# Altium PCB H-Bridge-Driver_V1.0.PcbDoc
Units mil, origin at the board's own origin, x right, y up, seen from the top; angles counter-clockwise.
Board outline 1050 x 1150 mil, 2 copper layers (Top Layer, Bottom Layer), stack 60.932 mil thick; 24 components, 19 nets, 76 pads, 10 vias.
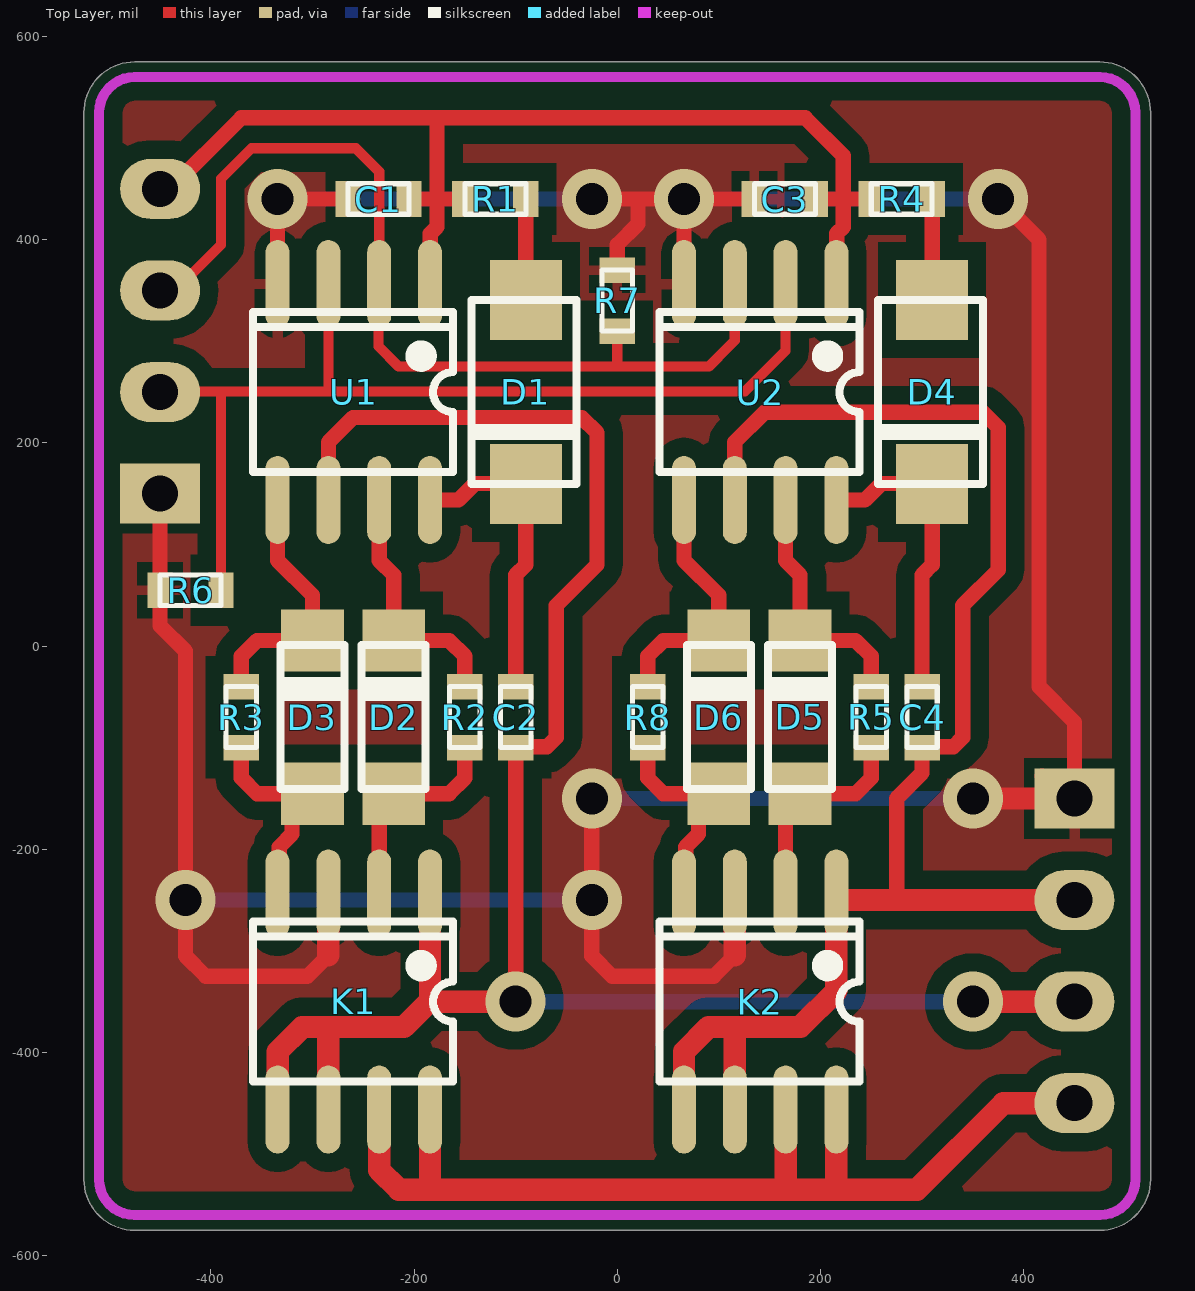
[diagram p0: Top Layer view]
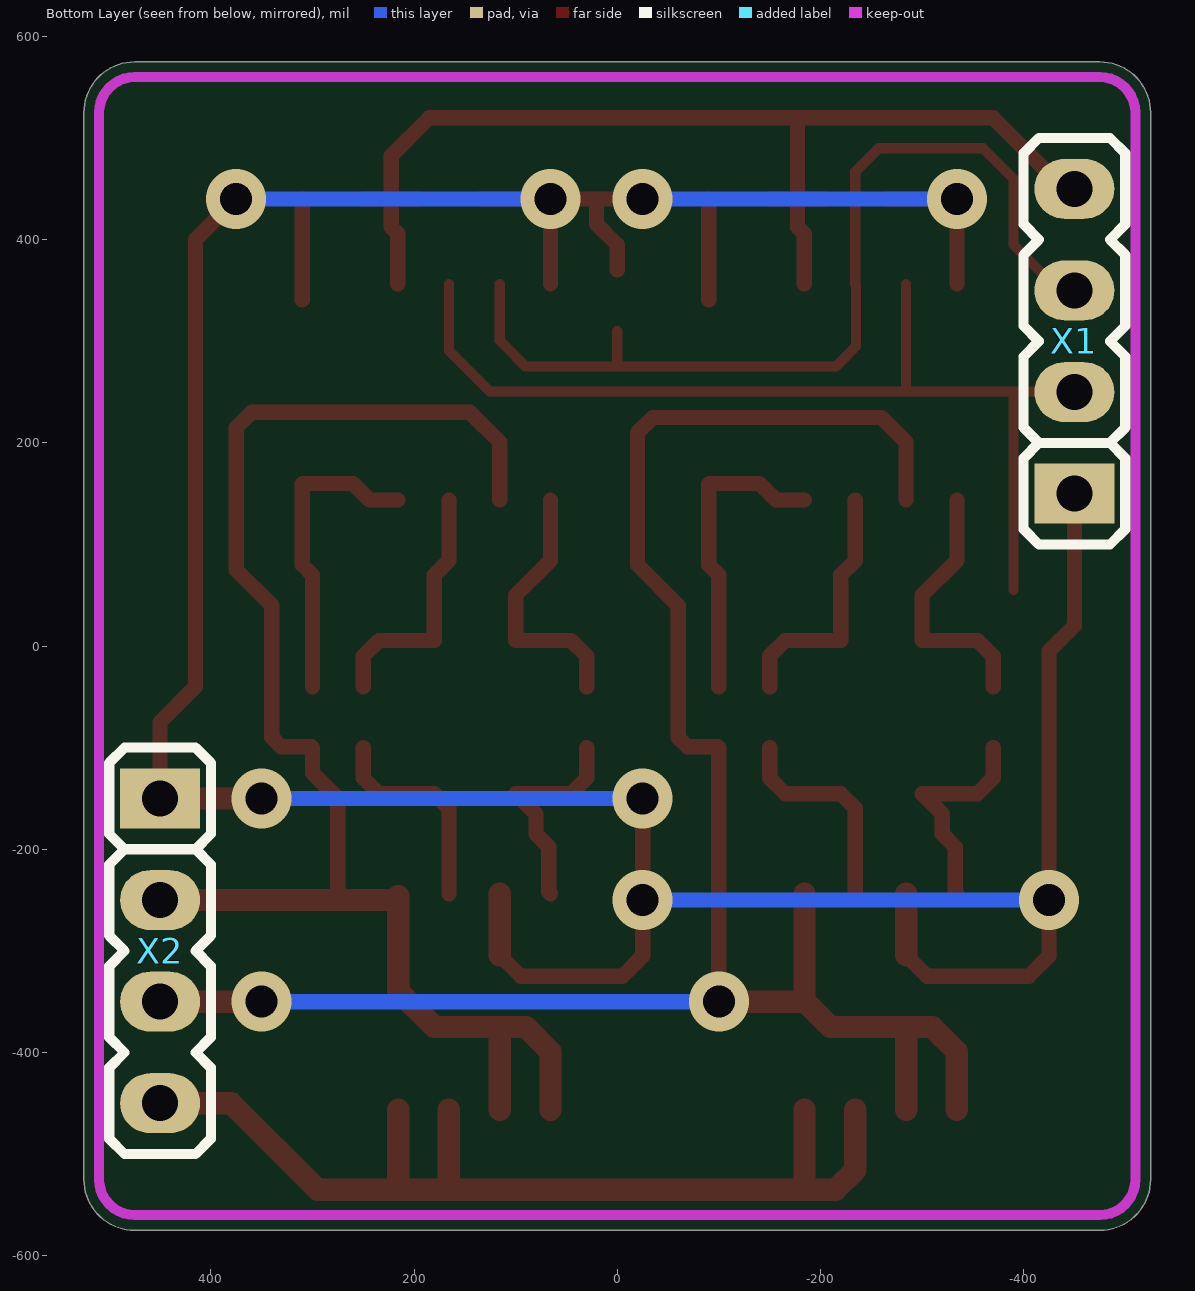
[diagram p1: Bottom Layer view, seen from below]

## Layer stack, top to bottom
Top Solder: solder mask 0.4, Solder Resist, Dk 3.5
Top Layer: signal copper 1.4
Dielectric1: dielectric 58.1323, FR-4, Dk 4.8
Bottom Layer: signal copper 1.4
Bottom Solder: solder mask 0.4, Solder Resist, Dk 3.5

## Board outline
-525,-525 -525,525 cw(c-475,525) -475,575 475,575 cw(c475,525) 525,525 525,-525 cw(c475,-525) 475,-575 -475,-575 cw(c-475,-525)

## Design rules (kind name [scope] priority, off if disabled: settings)
Clearance Ploygon [InPoly] p1: gap=18 ignorepadtopadclearanceinfootprint=FALSE
Clearance [All] p2: gap=6 ignorepadtopadclearanceinfootprint=FALSE
ComponentClearance ComponentClearance_Connectors [HasFootprint('THT PMOD-Connector')] p1: gap=0 collisioncheckmode=3 verticalgap=0 showdistances=FALSE
ComponentClearance ComponentClearance_Mechanical [(Identifier = 'M3 x 0.5mm Thread 6mm LONG SOCKET HEAD CAP SCREW') OR (Identifier = 'Hex Spacer FF M3 L10mm')] p2: gap=0 collisioncheckmode=3 verticalgap=0 showdistances=FALSE
ComponentClearance [All] p3: gap=7.87 collisioncheckmode=3 verticalgap=7.87 showdistances=TRUE
DiffPairsRouting [All] p1: maxlimit=10 minlimit=6 mostfreqgap=6 toplayer_minwidth=6 toplayer_maxwidth=15 toplayer_prefwidth=6 bottomlayer_minwidth=6 bottomlayer_maxwidth=15 bottomlayer_prefwidth=6 maxuncoupledlength=500
FabricationTestPointUsage TestPointUsage [All] p1: valid=0 allowmultiple=FALSE
FabricationTestpoint Testpoint [All] p1: side=3 testpointundercomponent=TRUE minsize=40 maxsize=100 preferedsize=60 minholesize=0 maxholesize=40 preferedholesize=32 testpointgrid=1 allowsidetop=TRUE allowsidebottom=TRUE usegrid=TRUE gridtolerance=0.01
HoleSize [All] p1: absolutevalues=TRUE maxlimit=1000 minlimit=1 maxpercent=80.000 minpercent=20.000
PolygonConnect [All] p1: thpad.connectstyle=Relief thpad.reliefconductorwidth=10 thpad.reliefentries=4 thpad.polygonreliefangle="90 Angle" thpad.airgapwidth=10 smdpad.connectstyle=Relief smdpad.reliefconductorwidth=10 smdpad.reliefentries=4 smdpad.polygonreliefangle="90 Angle" smdpad.airgapwidth=10 via.connectstyle=Direct via.reliefconductorwidth=10 via.reliefentries=4 via.polygonreliefangle="90 Angle" via.airgapwidth=10
RoutingVias [All] p1: holewidth=28 width=50 viastyle="Through Hole" minholewidth=28 minwidth=50 maxholewidth=28 maxwidth=50
SolderMaskExpansion [All] p1: expansion=4 istentingtop=FALSE
Width [All] p1: maxlimit=19685.04 minlimit=6 preferedwidth=10
25 further rules are at their usual default settings.

## Components (designator, comment, footprint, x,y, rotation, side; value= is the part's Value field where it differs from the comment)
C1 "1µF" "SMD Keramikkondensator 0603" -235,440 r0 top
C2 "100nF" "SMD Keramikkondensator 0603" -100,-70 r90 top
C3 "1µF" "SMD Keramikkondensator 0603" 165,440 r0 top
C4 "100nF" "SMD Keramikkondensator 0603" 300,-70 r90 top
D1 "GF1G" "SMD Diode DO-214-AC (SMA)" -90,250 r270 top
D2 "1N4148" "SMD Diode DO-213-AA" -220,-70 r90 top
D3 "1N4148" "SMD Diode DO-213-AA" -300,-70 r90 top
D4 "GF1G" "SMD Diode DO-214-AC (SMA)" 310,250 r270 top
D5 "1N4148" "SMD Diode DO-213-AA" 180,-70 r90 top
D6 "1N4148" "SMD Diode DO-213-AA" 100,-70 r90 top
K1 "FDS89141" "SMD IC SOIC-8" -260,-350 r180 top
K2 "FDS89141" "SMD IC SOIC-8" 140,-350 r180 top
R1 "10" "SMD Widerstand 0603" -120,440 r180 top
R2 "47" "SMD Widerstand 0603" -150,-70 r90 top
R3 "47" "SMD Widerstand 0603" -370,-70 r90 top
R4 "10" "SMD Widerstand 0603" 280,440 r180 top
R5 "47" "SMD Widerstand 0603" 250,-70 r90 top
R6 "1k" "SMD Widerstand 0603" -420,55 r0 top
R7 "1k" "SMD Widerstand 0603" 0,340 r270 top
R8 "47" "SMD Widerstand 0603" 30,-70 r90 top
U1 "LM5109A" "SMD IC SOIC-8" -260,250 r180 top
U2 "LM5109A" "SMD IC SOIC-8" 140,250 r180 top
X1 "Stiftleiste (4-Fach)" "THT Stiftleiste 1x4" -450,300 r90 bottom
X2 "Stiftleiste (4-Fach)" "THT Stiftleiste 1x4" 450,-300 r270 bottom

## Footprints (in the part's own frame and the unit in brackets; to place one, negate y for a bottom-side part, rotate by r counter-clockwise, add the part's x,y. Pads: shape width x height; smd on the part's side, far side on the other; paste and mask are expansions set on the pad)
"SMD Diode DO-213-AA" [mm] "SM LED; 2 Flat Leads"
  rect 1.555x1.57 smd: A(-1.915,0) K(1.915,0)
  silkscreen extent -1.8,-0.8 1.8,0.8, body extent -1.85,-0.79 1.85,0.79, height 1.6
"SMD Diode DO-214-AC (SMA)" [mm] "SM LED; 2 Flat Leads"
  rect 2x1.8 smd: A(-2.3,0) K(2.3,0)
  silkscreen extent -2.3,-1.36 2.3,1.27, body extent -2.8,-1.48 2.8,1.47, height 2.7
"SMD IC SOIC-8" [mm]
  oval 0.6x2.2 smd: 1(-1.922,-2.7) 2(-0.652,-2.7) 3(0.618,-2.7) 4(1.888,-2.7) 5(1.888,2.7) 6(0.618,2.7) 7(-0.652,2.7) 8(-1.922,2.7)
  silkscreen extent -2.5,-2 2.5,2, body extent -2.5,-3.12 2.5,3.12, height 1.75
"SMD Keramikkondensator 0603" [mil]
  rect 25x35 smd: 1(-30,0) 2(30,0)
  silkscreen extent -30,-15 30,15, body extent -31,-16 32,16, height 32
"SMD Widerstand 0603" [mil]
  rect 25x35 smd: 1(-30,0) 2(30,0)
  silkscreen extent -30,-15 30,15, body extent -31,-16 31,16, height 18
"THT Stiftleiste 1x4" [mm]
  rect 1.5x2 hole 0.9: 1(-3.81,0)
  oval 1.5x2 hole 0.9: 2(-1.27,0) 3(1.27,0) 4(3.81,0)
  silkscreen extent -5.08,-1.27 5.08,1.27, body extent -5.08,-1.27 5.08,1.27, height 8.6

## Part data
C1 C3: library part C-CAPACITOR, "CAP-MK", JLC-Parts=C15849, Bauteilwert="1µF 50V", Beschreibung=Keramikvielschichtkondensator, Digikey=1276-1860-1-ND, Farnell=3013383, Mouser=187-CL10A105KB8NNNC, Stückpreis=0.01
C2 C4: library part C-CAPACITOR, "CAP-MK", JLC-Parts=C14663, Bauteilwert="100nF 50V", Beschreibung=Keramikvielschichtkondensator, Digikey=445-5666-1-ND, Farnell=2522432, Mouser=77-VJ0603V104ZXAPBC, Stückpreis=0.01
D1 D2 D3 D4 D5 D6: library part R-DIODE, "DIODE (alt V)"
  D1 D4: Bauteilwert=GF1G, Beschreibung="General Purpose Rectifier Diode", Digikey=GF1GFSCT-ND, Farnell=1467478, Mouser=512-GF1G, Stückpreis=0.43
  D2 D3 D5 D6: Bauteilwert=1N4148WS-7-F, Beschreibung=Kleinsignal-Diode, Digikey=1N4148WSFSCT-ND, Farnell=2453269, Mouser=621-1N4148WSF-7, Stückpreis=0.14
K1 K2: library part K-FDS89141, "Dual N-Channel MOSFET", JLC-Parts=C606116, Bauteilwert=FDS89141, Beschreibung="Dual N-Channel MOSFET", ComponentLink1Description=Datasheet, ComponentLink1URL=https://datasheet.lcsc.com/szlcsc/1810201610_Sinopower-Semicon-APM4953KC-TRG_C20897.pdf, Digikey=FDS89141CT-ND, Farnell=2083349, Mouser=512-FDS89141, Stückpreis=1.90
R1 R4: library part R-RESISTOR, "RES (E=Heizwiderstand B=Messwandler)", JLC-Parts=C22859, Bauteilwert="10 (75V, 100mW, 1%)", Beschreibung="Dickschicht Chipwiderstand", Digikey=P10.0HCT-ND, Farnell=2302958, Mouser=667-ERJ-3EKF10R0V, Stückpreis=0.01
R2 R3 R5 R8: library part R-RESISTOR, "RES (E=Heizwiderstand B=Messwandler)", JLC-Parts=C23182, Bauteilwert="47 (75V, 100mW, 1%)", Beschreibung="Dickschicht Chipwiderstand", Digikey=P47.0HCT-ND, Farnell=2303030, Mouser=667-ERJ-3EKF47R0V, Stückpreis=0.01
R6 R7: library part R-RESISTOR, "RES (E=Heizwiderstand B=Messwandler)", JLC-Parts=C21190, Bauteilwert="1k (75V, 100mW, 1%)", Beschreibung="Dickschicht Chipwiderstand", Digikey=P1.00KHCT-ND, Farnell=2303145, Mouser=667-ERJ-3EKF1001V, Stückpreis=0.01
U1 U2: library part U-LM5109A, "High Voltage 1A Peak Half Bridge Gate Driver", JLC-Parts=C129332, Component Description="High Voltage Gate Driver", Component Value=LM5109A, ComponentLink1Description=Datasheet, ComponentLink1URL=https://www.ti.com/lit/ds/symlink/lm5109a.pdf?HQS=dis-mous-null-mousermode-dsf-pf-null-wwe&ts=1646723200072&ref_url=https%253A%252F%252Fwww.mouser.ch%252F, Digikey=LM5109AMA/NOPB-ND, Farnell=3005775, Mouser=926-LM5109AMA/NOPB
X1 X2: library part "X-Stiftleiste (4-Fach)", Bauteilwert=4-Pol, Beschreibung=Stiftleiste, Stückpreis=0.10

## Via types
v1: diameter 59.06, hole 31.5, Top Layer to Bottom Layer, 10 vias

## Nets (pads, with @x,y where several pads share a name; then routed paths per layer and width w, separated by ;. In a path a pad name is that pad's centre, name@x,y a point inside that pad or via, vN(x,y) a via of type N, cw(c..) or ccw(c..) an arc to the next point about the centre after c; other vN are vias at no path point)
12V: C1.2 C3.2 R1.2 R4.2 U1.1 U2.1 X1.4 | length 1122.6
  Top Layer w15: X1.4 -440,450 -370,520 -177.5,520 ; C1.2 -177.5,440 ; U1.1 -184,356.62 -184,406 -177.5,412.5 -177.5,440 ; R1.2 -177.5,440 ; C3.2 222.5,440 ; U2.1 216,356.62 216,406 222.5,412.5 222.5,440 ; R4.2 222.5,440 ; -177.5,440 -177.5,520 ; -177.5,520 185,520 222.5,482.5 222.5,440
GND: C1.1 C3.1 K1.3 K2.3 R6.1 R7.1 U1.4 U2.4 X1.1 X2.1 | length 3673.6
  Top Layer w15: X1.1 R6.1 -450,20 -425,-5 v1(-425,-250) -425,-305 -405,-325 -305,-325 -284.32,-304.32 ; U1.4 v1(-334.32,440) C1.1 ; v1(-25,-150) v1(-25,-250) -25,-305 -5,-325 95,-325 115.68,-304.32 ; v1@-25,434.19 v1(-25,440) 20.34,440 ; R7.1 0,395 20.34,415.34 20.34,440 ; U2.4 v1(65.68,440) ; C3.1 v1(65.68,440) ; v1(375,440) 415,400 415,-40 450,-75 X2.1 ; X2.1@418.13,-127.97 X2.1@440.16,-150 ; 20.34,440 v1(65.68,440)
  Top Layer w22: -284.32,-304.32 K1.3 ; 115.68,-304.32 K2.3 ; v1(350,-150) X2.1@440.16,-150
  Bottom Layer w15: v1(-425,-250) v1(-25,-250) ; v1(-334.32,440) v1(-25,440) ; v1(-25,-150) v1(350,-150) ; v1(65.68,440) v1(375,440)
HV: K1.7 K1.8 K2.7 K2.8 X2.4 | length 1023.9
  Top Layer w22: K1.7 -234.32,-515.68 -215,-535 -185,-535 ; K1.8 -184.32,-534.32 -185,-535 ; K2.7 165.68,-534.32 165,-535 ; K2.8 215.68,-534.32 215,-535 ; X2.4 380,-450 295,-535 215,-535 ; -185,-535 165,-535 ; 165,-535 215,-535
NetC2_1: C2.1 K1.1 K1.5 K1.6 U1.6 X2.3 | length 1999.3
  Top Layer w15: -284.32,-379.32 -280,-375 ; U1.6 -284.32,200.68 -260,225 -35,225 -20,210 -20,80 -60,40 -60,-90 -69.09,-99.09 -99.09,-99.09 C2.1 v1(-100,-350) ; -184.32,-349.32 -183.64,-350
  Top Layer w22: K1.5 -334.32,-399.32 -310,-375 -280,-375 -210,-375 -184.32,-349.32 K1.1 ; K1.6 -284.32,-379.32 ; -183.64,-350 v1(-100,-350) ; v1(350,-350) X2.3
  Bottom Layer w15: v1(-100,-350) v1(350,-350)
NetC2_2: C2.2 D1.K U1.8 | length 304.9
  Top Layer w15: U1.8 -156.3,143.7 -140,160 -90.55,160 D1.K -90,80 -100,70 C2.2
NetC4_1: C4.1 K2.1 K2.5 K2.6 U2.6 X2.2 | length 1505.2
  Top Layer w15: 115.68,-379.32 120,-375 ; U2.6 115.68,200.68 145,230 360,230 375,215 375,75 340,40 340,-90 330.91,-99.09 300.91,-99.09 C4.1 300,-125 275,-150 275,-250 ; K2.1 215.68,-246.02 K2.1@219.66,-250
  Top Layer w22: K2.5 65.68,-399.32 90,-375 120,-375 180,-375 215.68,-339.32 K2.1@215.68,-246.02 ; K2.6 115.68,-379.32 ; K2.1@219.66,-250 275,-250 X2.2
NetC4_2: C4.2 D4.K U2.8 | length 304.9
  Top Layer w15: U2.8 243.7,143.7 260,160 309.45,160 D4.K 310,80 300,70 C4.2
NetD1_A: D1.A R1.1 | length 99.4
  Top Layer w15: D1.A R1.1
NetD2_A: D2.A K1.2 R2.1 | length 210.6
  Top Layer w15: K1.2 -234.32,-159.72 D2.A -165.39,-145.39 -150,-130 R2.1
NetD2_K: D2.K R2.2 U1.7 | length 250.6
  Top Layer w15: U1.7 -234.32,84.32 -220,70 D2.K -165.39,5.39 -150,-10 R2.2
NetD3_A: D3.A K1.4 R3.1 | length 218.9
  Top Layer w15: R3.1 -370,-130 -354.61,-145.39 D3.A -320,-165.39 -320,-185 -332.67,-197.67 -332.67,-242.05 K1.4
NetD3_K: D3.K R3.2 U1.5 | length 258.9
  Top Layer w15: R3.2 -370,-10 -354.61,5.39 D3.K -300,50 -334.32,84.32 U1.5
NetD4_A: D4.A R4.1 | length 99.4
  Top Layer w15: D4.A R4.1
NetD5_A: D5.A K2.2 R5.1 | length 210.6
  Top Layer w15: K2.2 165.68,-159.72 D5.A 234.61,-145.39 250,-130 R5.1
NetD5_K: D5.K R5.2 U2.7 | length 250.6
  Top Layer w15: U2.7 165.68,84.32 180,70 D5.K 234.61,5.39 250,-10 R5.2
NetD6_A: D6.A K2.4 R8.1 | length 218.9
  Top Layer w15: R8.1 30,-130 45.39,-145.39 D6.A 80,-165.39 80,-185 67.33,-197.67 67.33,-242.05 K2.4
NetD6_K: D6.K R8.2 U2.5 | length 258.9
  Top Layer w15: R8.2 30,-10 45.39,5.39 D6.K 100,50 65.68,84.32 U2.5
NetR6_2: R6.2 U1.3 U2.2 X1.2 | length 998.5
  Top Layer w10: X1.2@-450,250.68 -284.32,250.68 ; R6.2 -390,250 ; U1.3 -284.32,250.68 ; U2.2 165.68,290.68 125.68,250.68 -284.32,250.68
NetR7_2: R7.2 U1.2 U2.3 X1.3 | length 953.8
  Top Layer w10: X1.3 -435,350 -390,395 -390,460 -360,490 -257.36,490 -234.32,466.96 U1.2 -235,355.62 -235,295 -215,275 0,275 ; R7.2 0,275 ; U2.3 115.68,300.68 110.01,295.01 90,275 0,275

## Polygon pours and split planes (outlines as drawn)
GND on Top Layer "GND_L01_P000" (solid, pour order 0): -525,525 cw(c-475,525) -475,575 475,575 cw(c475,525) 525,525 525,-525 cw(c475,-525) 475,-575 -475,-575 cw(c-475,-525) -525,-525

## Keep-outs
Keep-Out Layer:
  lines w10: -510,-525 ccw(c-475,-525) -475,-560 0,-560 475,-560 ccw(c475,-525) 510,-525 510,0 510,525 ccw(c475,525) 475,560 0,560 -475,560 ccw(c-475,525) -510,525 -510,0 -510,-525

## Silkscreen, mask and mechanical layers (free items; w line width, h text height)
Mechanical 1:
  lines w10: -525,-525 ccw(c-475,-525) -475,-575 0,-575 475,-575 ccw(c475,-525) 525,-525 525,0 525,525 ccw(c475,525) 475,575 0,575 -475,575 ccw(c-475,525) -525,525 -525,0 -525,-525
Mechanical 15:
  lines w5: -5593.7,-2209.45 -5393.7,-2209.45 ; -5593.7,-309.45 -5393.7,-309.45 ; -5593.7,1590.55 -5393.7,1590.55 ; -5393.7,-3609.45 -893.7,-3609.45 ; -5393.7,-3309.45 -893.7,-3309.45 ; -4493.7,-3909.45 -4493.7,-3309.45 ; -2718.7,-4109.45 -2718.7,-3909.45 ; -2718.7,3290.55 -2718.7,3490.55 ; -2393.7,-3909.45 -2393.7,-3309.45 -2393.7,-2709.45 ; -2393.7,-3009.45 -893.7,-3009.45 ; 156.3,-4109.45 156.3,-3909.45 ; 156.3,3290.55 156.3,3490.55 ; 506.3,-3909.45 -893.7,-3909.45 ; 3031.3,-4109.45 3031.3,-3909.45 ; 3031.3,3290.55 3031.3,3490.55 ; 5315.75,-2219.69 5515.75,-2219.69 ; 5315.75,-290.55 5515.75,-290.55 ; 5315.75,1599.21 5515.75,1599.21 ; -5393.7,-3909.45 5315.75,-3912.6 5315.75,3292.13 -5393.7,3290.55 -5393.7,-3909.45 ; -5393.7,-3909.45 -893.7,-3909.45 ; -5393.7,-3909.45 -5393.7,-2709.45 -2393.7,-2709.45 ; -2393.7,-2709.45 -893.7,-2709.45 -893.7,-3909.45 ; -5593.7,-4109.45 5512.6,-4109.45 5512.6,3488.98 -5593.7,3490.55 -5593.7,-4109.45
  text "4" at -4130.7,3355.55 h70
  text "3" at -1260.7,3355.55 h70
  text "2" at 1619.3,3355.55 h70
  text "1" at 4479.3,3355.55 h70
  text "A" at 5473.23,2465.35 h70
  text "A" at -5468.7,2449.55 h70
  text "B" at 5433.86,575.59 h70
  text "B" at -5468.7,557.55 h70
  text "C" at -5468.7,-1352.45 h70
  text "C" at 5433.86,-1353.54 h70
  text "TITLE:" at -2443.7,-2809.45 h45
  text "ENGINEER:" at -943.7,-2809.45 h45
  text "Florian Baumgartner" at -1002.6,-2960.75 h70
  text "PCB DESIGNER:" at -943.7,-3104.45 h45
  text "B-Bridge-Driver" at -2468.15,-3127.76 h157.48
  text "D" at -5468.7,-3242.45 h70
  text "D" at 5433.86,-3243.31 h70
  text "Florian Baumgartner" at -1002.6,-3260.75 h70
  text "REV:" at -4543.7,-3409.45 h45
  text "PART NO.:" at -2443.7,-3409.45 h45
  text "DATE:" at -943.7,-3409.45 h45
  text "08.03.2022" at -993.7,-3529.45 h70
  text "V1.0" at -4577.6,-3560.75 h70
  text "1/1" at -2452.6,-3560.75 h70
  text "SCALE:" at -4543.7,-3709.45 h45
  text "DWG NO:" at -2443.7,-3709.45 h45
  text "FILE NAME:" at -943.7,-3709.45 h45
  text "H-Bridge-Driver_V1.0.PcbDoc" at -1002.6,-3835.75 h51.97
  text "1:1" at -4577.6,-3860.75 h70
  text "1/1" at -2452.6,-3860.75 h70
  text "4" at -4130.7,-4044.45 h70
  text "3" at -1260.7,-4044.45 h70
  text "2" at 1619.3,-4044.45 h70
  text "1" at 4479.3,-4044.45 h70
Mechanical 16:
  lines w5: -5593.7,-2219.69 -5393.7,-2219.69 ; -5593.7,-290.55 -5393.7,-290.55 ; -5593.7,1599.21 -5393.7,1599.21 ; -3109.25,-4109.45 -3109.25,-3909.45 ; -3109.25,3290.55 -3109.25,3490.55 ; -584.25,-3909.45 815.75,-3909.45 ; -234.25,-4109.45 -234.25,-3909.45 ; -234.25,3290.55 -234.25,3490.55 ; 815.75,-3609.45 5315.75,-3609.45 ; 815.75,-3309.45 5315.75,-3309.45 ; 815.75,-3009.45 2315.75,-3009.45 ; 2315.75,-3909.45 2315.75,-3309.45 2315.75,-2709.45 ; 2640.75,-4109.45 2640.75,-3909.45 ; 2640.75,3290.55 2640.75,3490.55 ; 4415.75,-3909.45 4415.75,-3309.45 ; 5315.75,-2209.45 5515.75,-2209.45 ; 5315.75,-309.45 5515.75,-309.45 ; 5315.75,1590.55 5515.75,1590.55 ; 815.75,-3909.45 815.75,-2709.45 2315.75,-2709.45 ; 815.75,-3909.45 5315.75,-3909.45 ; 2315.75,-2709.45 5315.75,-2709.45 5315.75,-3909.45 ; 5315.75,-3909.45 5315.75,3290.55 -5393.7,3292.13 -5393.7,-3912.6 5315.75,-3909.45 ; -5590.55,-4109.45 -5590.55,3488.98 5515.75,3490.55 5515.75,-4109.45 -5590.55,-4109.45
  text "1" at -4557.25,3355.55 h70
  text "2" at -1697.25,3355.55 h70
  text "3" at 1182.75,3355.55 h70
  text "4" at 4052.75,3355.55 h70
  text "A" at -5551.18,2465.35 h70
  text "A" at 5390.75,2449.55 h70
  text "B" at -5511.81,575.59 h70
  text "B" at 5390.75,557.55 h70
  text "C" at 5390.75,-1352.45 h70
  text "C" at -5511.81,-1353.54 h70
  text "ENGINEER:" at 865.75,-2809.45 h45
  text "TITLE:" at 2365.75,-2809.45 h45
  text "Florian Baumgartner" at 906.85,-2960.75 h70
  text "PCB DESIGNER:" at 865.75,-3104.45 h45
  text "B-Bridge-Driver" at 2381.85,-3127.76 h157.48
  text "D" at 5390.75,-3242.45 h70
  text "D" at -5511.81,-3243.31 h70
  text "Florian Baumgartner" at 906.85,-3260.75 h70
  text "DATE:" at 865.75,-3409.45 h45
  text "PART NO.:" at 2365.75,-3409.45 h45
  text "REV:" at 4465.75,-3409.45 h45
  text "08.03.2022" at 915.75,-3529.45 h70
  text "1/1" at 2356.85,-3560.75 h70
  text "V1.0" at 4456.85,-3560.75 h70
  text "FILE NAME:" at 865.75,-3709.45 h45
  text "DWG NO:" at 2365.75,-3709.45 h45
  text "SCALE:" at 4465.75,-3709.45 h45
  text "H-Bridge-Driver_V1.0.PcbDoc" at 906.85,-3835.75 h51.97
  text "1/1" at 2356.85,-3860.75 h70
  text "1:1" at 4456.85,-3860.75 h70
  text "1" at -4557.25,-4044.45 h70
  text "2" at -1697.25,-4044.45 h70
  text "3" at 1182.75,-4044.45 h70
  text "4" at 4052.75,-4044.45 h70

## Dimensions
475,575 to 475,-575 on Mechanical 4
-525,525 to 475,575 on Mechanical 4